# Altium PCB NF-03.pcbdoc
Units mm, origin at the board's own origin, x right, y up, seen from the top; angles counter-clockwise.
Board outline 73.79 x 79.6 mm, 2 copper layers (Top Layer, Bottom Layer); 1 components, 14 nets, 8 pads, 0 vias.
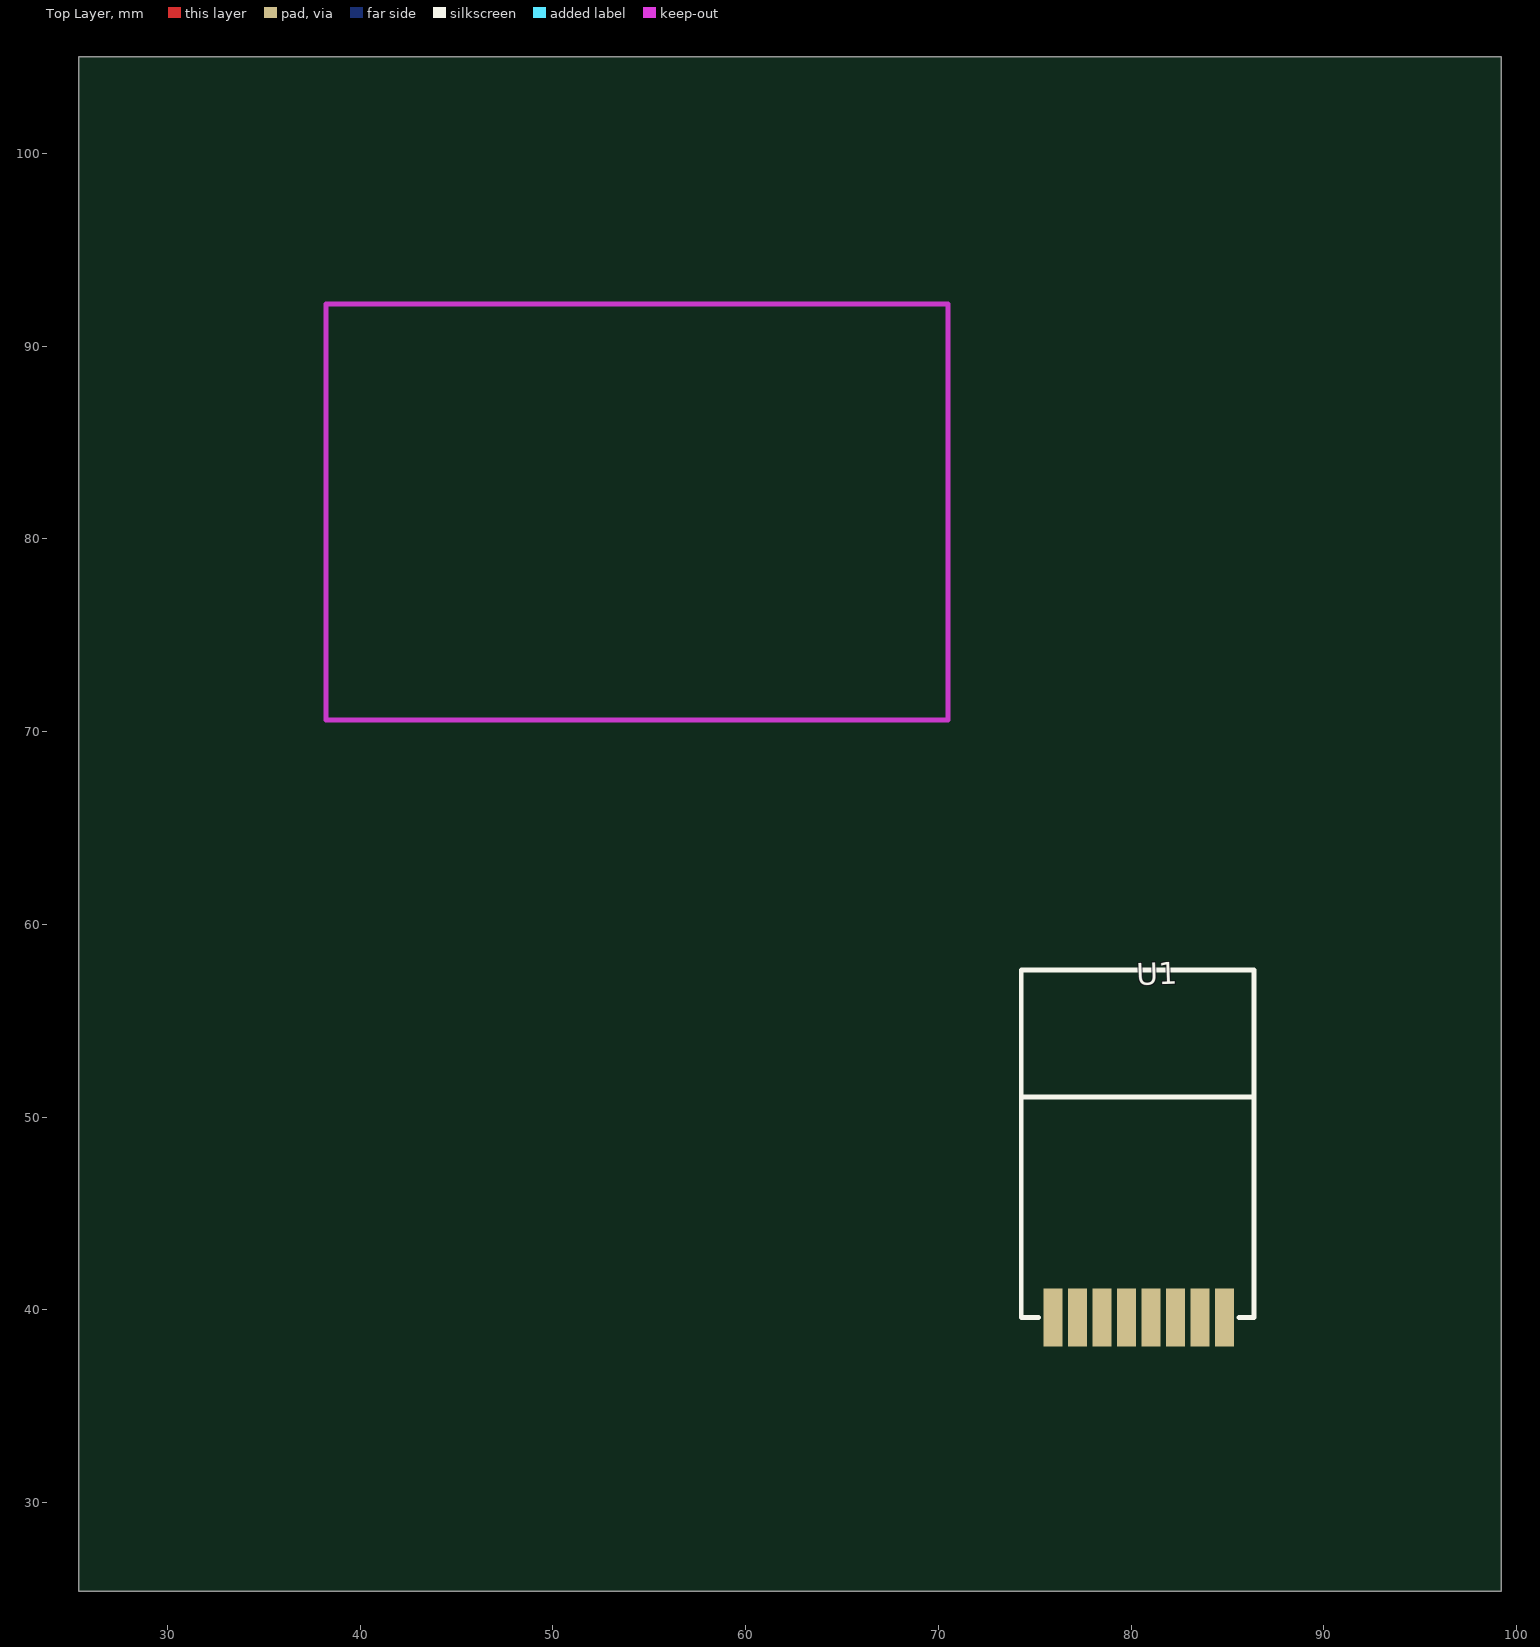
[diagram p0: Top Layer view]
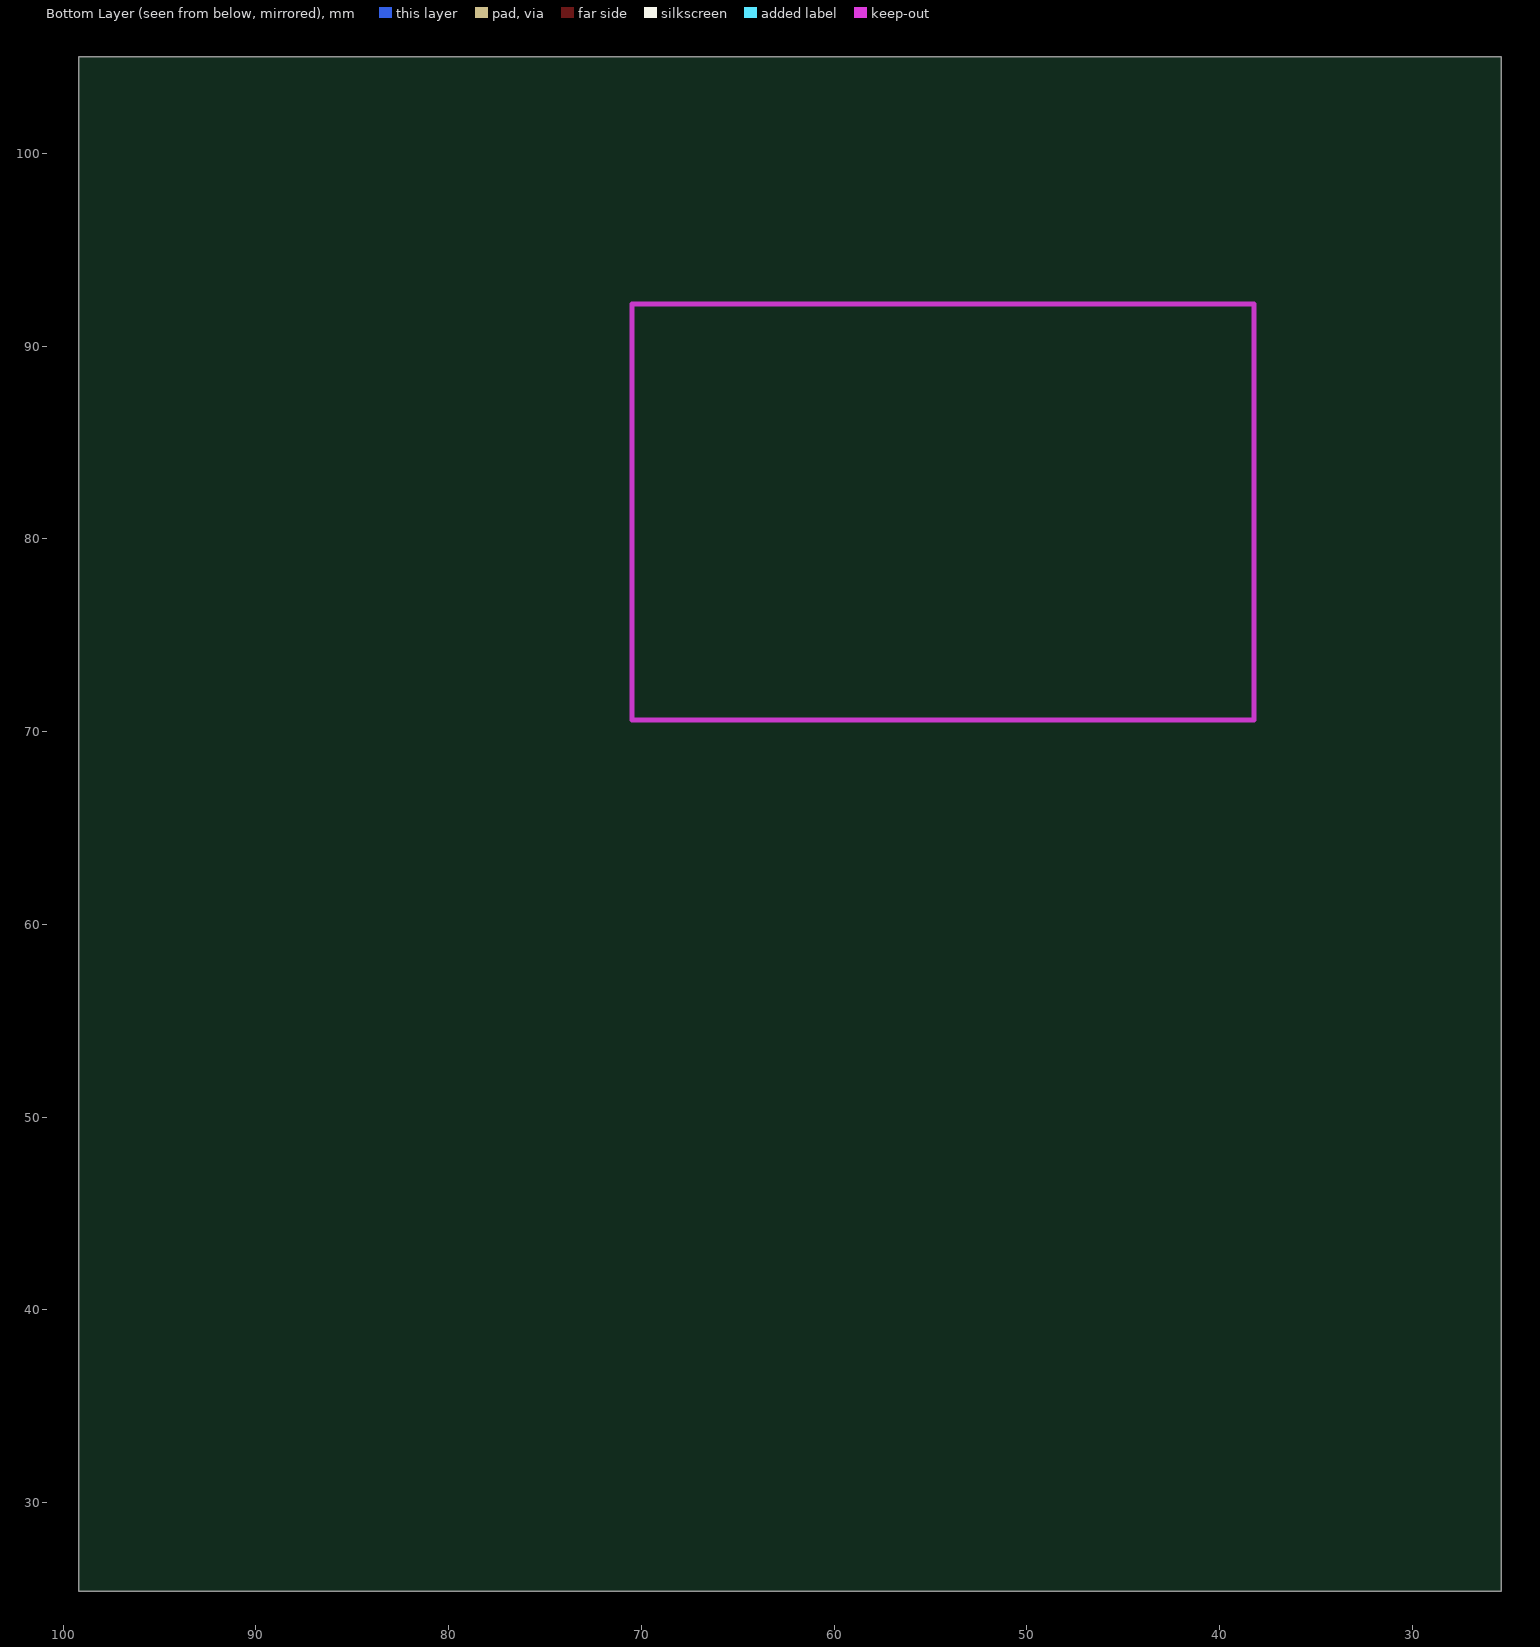
[diagram p1: Bottom Layer view, seen from below]

## Layer stack, top to bottom
Top Layer: signal copper (thickness not stored)
Dielectric: dielectric 0.32, FR-4, Dk 4.8
Bottom Layer: signal copper (thickness not stored)

## Board outline
99.187,25.4 25.4,25.4 25.4,105.005 99.187,105.005

## Components (designator, comment, footprint, x,y, rotation, side; value= is the part's Value field where it differs from the comment)
U1 "NF-04-MI-2.4G" NF-04-MI-2.4G 80.391,39.6 r0 top

## Footprints (in the part's own frame and the unit in brackets; to place one, negate y for a bottom-side part, rotate by r counter-clockwise, add the part's x,y. Pads: shape width x height; smd on the part's side, far side on the other; paste and mask are expansions set on the pad)
NF-04-MI-2.4G [mm]
  rect 1x3 smd: 1(-4.445,0) 2(-3.175,0) 3(-1.905,0) 4(-0.635,0) 5(0.635,0) 6(1.905,0) 7(3.175,0) 8(4.445,0)
  silkscreen extent -6.1,0 5.97,18.03

## Nets (pads, with @x,y where several pads share a name; then routed paths per layer and width w, separated by ;. In a path a pad name is that pad's centre, name@x,y a point inside that pad or via, vN(x,y) a via of type N, cw(c..) or ccw(c..) an arc to the next point about the centre after c; other vN are vias at no path point)
S$56: 
S$58: 
S$60: 
S$63: 
S$65: 
S$67: 
U1_1: U1.1
U1_2: U1.2
U1_3: U1.3
U1_4: U1.4
U1_5: U1.5
U1_6: U1.6
U1_7: U1.7
U1_8: U1.8

## Silkscreen, mask and mechanical layers (free items; w line width, h text height)
Document:
  lines w0.003: 62.268,65.177 62.319,65.228